# Altium PCB doppler.PcbDoc (part 2 of 2)
Units mil, origin at the board's own origin, x right, y up, seen from the top; angles counter-clockwise.
Board outline 6000 x 4000 mil, 2 copper layers (Top Layer, Bottom Layer); 102 components, 73 nets, 370 pads, 9 vias.
Unrouted connection lines stored in the file: 254.
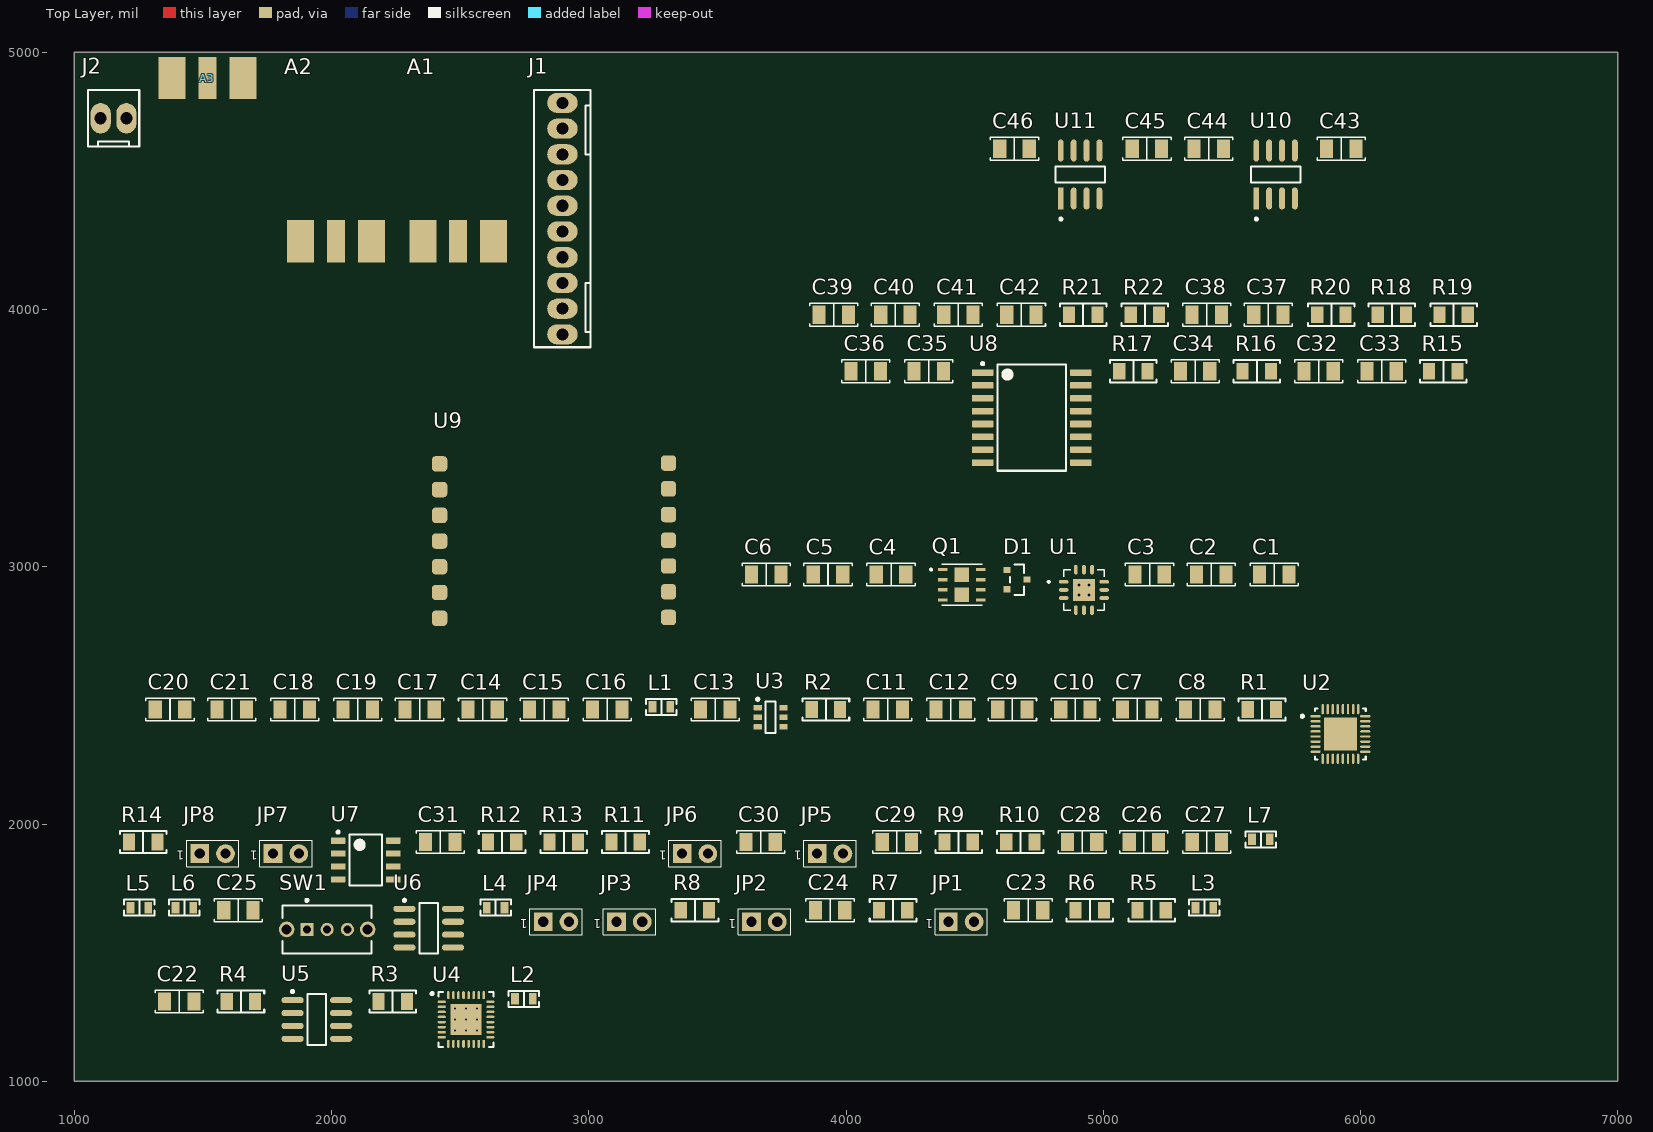
[diagram p0: Top Layer view]

## Part data (continued)
U3: library part CMP-0018-00482-2, "Wideband, Ultra-Low Noise, Voltage Feedback Operational Amplifier with Shutdown, 10 to 12 V, -40 to 85 degC, 6-pin SOT23 (DBV6), Green (RoHS & no Sb/Br)", Manufacturer="Texas Instruments", 2nd Harmonic(dBc)=105, 3rd Harmonic(dBc)=110, @ MHz=5, Acl, min stable gain(V/V)=12, BW @ Acl(MHz)=600, Code_JEDEC=MO-178, ComponentLink1Description="Manufacturer URL", ComponentLink1URL=http://www.ti.com/, ComponentLink2Description=Datasheet, ComponentLink2URL=http://www.ti.com/general/docs/lit/getliterature.tsp?genericPartNumber=OPA847&fileType=pdf, ComponentLink3Description="Package Specification", ComponentLink3URL=http://www.ti.com/litv/pdf/mpds026h, DatasheetVersion=SBOS251E, Eco-Plan="Green (RoHS & no Sb/Br)", Iib(Max)(nA)=42000, Io(Typ)(mA)=75, Iq per channel(Max)(mA)=18.9, Mounting Technology="Surface Mount", Number of Channels=1, PackageDescription="6-Pin Plastic Small Outline, Body 1.6 x 2.9 mm, Pitch 0.95 mm", PackageReference=DBV0006A, PackageVersion="4073253-5/K, 03/2006", PartNumber=OPA847IDBVR, Settling Time (0.1%)(Typ)(ns)=20, Slew Rate(Typ)(V/us)=950, Sub Family="High Output Current Amplifier (>=50mA), High Speed Amplifier (>=50MHz), Low Offset Voltage Amplifier (<=500uV)", THD (Fc is 1 MHz)(Typ)(dB)=-96, Vio(Max)(mV)=0.5, Vn at Flatband(Typ)(nV/rtHz)=0.85, Vs(Max)(V)=12, Vs(Min)(V)=10
U4: library part CMP-0285-00056-1, "DC to 50 MHz, Dual I/Q Demodulator and Phase Shifter, CP-32-2, Pb-Free, 1500 Reel", Max RF Frequency (MHz)=50MHz, Min RF Frequency (MHz)=0Hz, Amplitude Error (dB)=50mdB, Code_JEDEC=MO-220-VHHD-2, ComponentLink1Description="Manufacturer URL", ComponentLink1URL=www.analog.com, ComponentLink2Description=Datasheet, ComponentLink2URL=http://www.analog.com/static/imported-files/data_sheets/AD8333.pdf, ComponentLink3Description="Package Specification", ComponentLink3URL=http://www.analog.com/static/imported-files/packages/414143737956480539664569CP_32_2.pdf, DatasheetVersion="Rev. D", IIP3 (+dBm)=30dBm, PackageDescription="32-Lead Lead Frame Chip Scale Package [LFCSP_VQ]", PackageReference=CP-32-2, PackageVersion=Jan-2005, Phase Error (deg)=0.1Deg
U5 U6: library part CMP-0384-00646-2, "Single Channel Low Power Operational Amplifier, 490 MHz BW, 120 V/us SR, Industrial, 8-pin SOIC (R-8), Tube", Amplifiers Per Package=1, Generic Part Number=AD8021, Input Bias Current=7.5uA, Input Offset Voltage=400uV, Manufacturer="Analog Devices", Code_JEDEC=MS-012-AA, ComponentLink1Description="Manufacturer URL", ComponentLink1URL=http://www.analog.com/en/index.html, ComponentLink2Description=Datasheet, ComponentLink2URL=http://www.analog.com/static/imported-files/data_sheets/AD8021.pdf, ComponentLink3Description="Package Specification", ComponentLink3URL=http://www.analog.com/static/imported-files/packages/PKG_PDF/SOIC_Narrow%20(R)/R_8.pdf, ComponentLink4Description="Reference Circuit", ComponentLink4URL=http://www.analog.com/en/all-operational-amplifiers-op-amps/operational-amplifiers-op-amps/ad8021/products/product.html#product-recommendations, DatasheetVersion="Rev. F", Iq/Amp=7.7mA, Mounting Technology="Surface Mount", PackageDescription="8-Pin Standard Small Outline Package, Body 3.9 x 4.9 mm, Pitch 1.27 mm", PackageReference=R-8, PackageVersion=060506-A, PartNumber=AD8021ARZ, RevisionNote="Reference Circuit URL fixed", Slew Rate=120V/us, Small Signal Bandwidth=490MHz, V Span Max=24V, V Span Min=4.5V
U7: library part CMP-0058-00917-3, "Dual Low Voltage Differential Signaling (LVDS) Driver, 8 pin SOIC NARROW", Manufacturer="Texas Instruments", PackageTopMarking=NSZXTT*DS90C*401M, PowerWise=N, Code_IPC=SOIC127P600-8, Code_JEDEC=MS-012-AA, ComponentLink1Description="Datasheet URL", ComponentLink1URL=http://www.ti.com/general/docs/lit/getliterature.tsp?genericPartNumber=DS90C401&fileType=pdf, CompType="Interface IC", PackageDescription="SOIC Narrow, 4.9 x 3.9 x 1.45mm, 8 Lead, 1.27mm Pitch", PackageReference=D0008A, PinCount=8, RoHS=N
U8: library part CMP-0272-03500-3, "Quad Low-Noise High-Speed JFET-Input Operational Amplifier, 4.5 to 38 V, 0 to 70 degC, 16-pin SOIC (DW16), Green (RoHS & no Sb/Br)", Manufacturer="Texas Instruments", Rating=Catalog, Total Supply Voltage(Max)(+5V is 5, +/-5V is 10)=38, Total Supply Voltage(Min)(+5V is 5, +/-5V is 10)=4.5, CMRR(Min)(dB)=70, Code_JEDEC=MS-013, ComponentLink1Description="Manufacturer URL", ComponentLink1URL=http://www.ti.com/, ComponentLink2Description=Datasheet, ComponentLink2URL=http://www.ti.com/lit/ds/symlink/tle2074.pdf, ComponentLink3Description="Package Specification", ComponentLink3URL=http://www.ti.com/litv/pdf/msoi003g, DatasheetVersion=SLOS181C, Eco-Plan="Green (RoHS & no Sb/Br)", GBW(Typ)(MHz)=9.4, IIB(Max)(pA)=175, Iq per channel(Max)(mA)=1.875, Mounting Technology="Surface Mount", Number of Channels=4, Offset Drift(Typ)(uV/C)=10.1, PackageDescription="16-Pin Plastic Small Outline, Body 10.30 x 7.50 mm, Pitch 1.27 mm", PackageReference=DW0016A, PackageVersion="4040000-2/G, 01/2011", Packing=TUBE, PartNumber=TLE2074CDW, Slew Rate(Typ)(V/us)=35, Sub Family="High Output Current Amplifier (>=50mA), High Supply Voltage Amplifier (>=30V), Precision Amplifier", Vio (25C)(Max)(mV)=5
U9: library part CMP-00025-00003-2, "Rf Filter Band Pass 4.5MHZ 14SMD", Supplier 1=Mouser
U10 U11: library part CMP-09116-000396-1, "IC SAMPL/HOLD 1 CIRCUIT 8SOIC", Case/Package=SOIC, Dual Supply Voltage=5V, Input Bias Current=100nA, Input Offset Voltage (Vos)=50mV, Max Dual Supply Voltage=5.25V, Max Operating Temperature=70°C, Min Dual Supply Voltage=4.75V, Min Operating Temperature=0°C, Operating Supply Current=9.5mA, Output Current per Channel=5mA, Package Quantity=1, -3db Bandwidth=15MHz, Bandwidth=15MHz, Contact Plating=Tin, Height=2.45mm, Lead Free="Contains Lead", Length=5mm, Max Supply Voltage=5.25V, Min Supply Voltage=4.75V, Mount="Surface Mount", Number of Amplifiers=1, Number of Channels=1, Number of Circuits=1, Number of Pins=8, Operating Supply Voltage=5V, Packaging=Rail/Tube, REACH SVHC="No SVHC", RoHS Compliant=Yes, Series=-, Settling Time=150ns, Width=4.01mm

## Via types
v1: diameter 19.68, hole 7.87, Top Layer to Bottom Layer, 9 vias

## Nets (pads, with @x,y where several pads share a name; then routed paths per layer and width w, separated by ;. In a path a pad name is that pad's centre, name@x,y a point inside that pad or via, vN(x,y) a via of type N, cw(c..) or ccw(c..) an arc to the next point about the centre after c; other vN are vias at no path point)
+5: C1.2 C7.2 C8.2 C41.2 C42.2 C43.1 C45.1 L1.1 L2.2 L4.2 L6.2 R5.2 R6.2 R7.2 R8.2 R9.2 R10.2 R15.2 SW1.1 U1.8 U1.10 U1.11 U3.2 U4.26 U7.1 U8.4 U10.1 U11.1
+30: C2.2 Q1.4
-5: C6.2 C18.2 C19.2 C39.2 C40.2 C44.2 C46.1 L3.1 L5.1 L7.1 R12.2 R13.1 U1.2 U1.5 U1.6 U3.6 U8.13 U10.5 U11.5
-30: C5.2 Q1.1
GND: A1.G A2.G A3.G C1.1 C2.1 C5.1 C6.1 C7.1 C8.1 C11.2 C12.2 C14.1 C15.1 C16.2 C18.1 C19.1 C20.1 C21.1 C23.2 C24.2 C26.1 C27.1 C28.2 C32.1 C33.1 C34.1 C36.1 C38.1 C39.1 C40.1 C41.1 C42.1 C43.2 C44.1 C45.2 C46.2 J1.2 J1.4 JP1.2 JP2.2 JP3.2 JP4.2 R2.2 R11.2 R14.2 R16.2 SW1.3 U1.4 U2.6 U2.10 U2.11 U2.14 U2.15 U2.17 U2.24 U2.25 U2.27 U2.31 U2.33 U3.4 U3.5 U4.3 U4.7 U4.8 U4.9 U4.10 U4.12 U4.13 U4.20 U5.1 U5.3 U6.1 U6.3 U7.5 U7.8 U8.14 U8.15 U9.1 U9.3 U9.4 U9.5 U9.7 U9.8 U9.10 U9.11 U9.12 U9.14 U10.3 U11.3
LNAN_OUT: R1.2 U2.1
LNAP_OUT: C17.1 U2.32
LOSCN: JP6.2 JP8.2 U4.5
LOSCP: JP5.2 JP7.2 U4.4
NetA1_S: A1.S J1.7
NetA2_S: A2.S D1.3
NetA3_S: A3.S U9.2
NetC3_1: C3.1 U1.9
NetC3_2: C3.2 Q1.3
NetC4_1: C4.1 U1.7
NetC4_2: C4.2 Q1.2
NetC9_1: C9.1 U2.29
NetC9_2: C9.2 C10.2 C13.1 C16.1 U2.3
NetC10_1: C10.1 R1.1
NetC11_1: C11.1 C12.1 R2.1 U2.16
NetC13_2: C13.2 U3.1
NetC17_2: C17.2 U2.30
NetC20_2: C20.2 C21.2 U2.28
NetC22_1: C22.1 C24.1 L3.2 U5.4
NetC22_2: C22.2 U5.5
NetC23_1: C23.1 U4.6
NetC25_1: C25.1 C28.1 L7.2 U6.4
NetC25_2: C25.2 U6.5
NetC26_2: C26.2 L5.2 U4.21
NetC27_2: C27.2 L6.1 U4.11 U4.14 U4.27 U4.30
NetC29_1: C29.1 JP5.1 R9.1 R12.1
NetC29_2: C29.2 J2.1
NetC30_1: C30.1 JP6.1 R10.1 R13.2
NetC30_2: C30.2 J2.2
NetC31_1: C31.1 R14.1 U7.4
NetC31_2: C31.2 J1.6 R11.1
NetC32_2: C32.2 C33.2 R15.1 R16.1 U8.12
NetC35_1: C35.1 U10.8
NetC35_2: C35.2 R17.1 U8.3
NetC36_2: C36.2 R19.1
NetC37_1: C37.1 U11.8
NetC37_2: C37.2 R20.1 U8.5
NetC38_2: C38.2 R22.1
NetD1_1: D1.1 Q1.5 Q1.6 Q1.10
NetD1_2: D1.2 Q1.7 Q1.8 Q1.9
NetJ1_1: J1.1 U1.1
NetJ1_3: J1.3 U1.3
NetJ1_5: J1.5 U1.12
NetJ1_9: J1.9 R18.2 U8.1
NetJ1_10: J1.10 R21.2 U8.7
NetJP1_1: JP1.1 R5.1 U4.31
NetJP2_1: JP2.1 R6.1 U4.32
NetJP3_1: JP3.1 R7.1 U4.1
NetJP4_1: JP4.1 R8.1 U4.2
NetJP7_1: JP7.1 U7.3
NetJP8_1: JP8.1 U7.2
NetL2_1: L2.1 U5.7 U5.8
NetL4_1: L4.1 U6.7 U6.8
NetR3_1: R3.1 U4.29
NetR3_2: R3.2 U2.23
NetR4_1: R4.1 U4.28
NetR4_2: R4.2 U2.22
NetR18_1: R18.1 R19.2 U8.2
NetR21_1: R21.1 R22.2 U8.6
NetSW1_2: SW1.2 U4.15
NetU3_3: U3.3 U9.9
NetU4_24: U4.24 U5.2
NetU4_25: U4.25 U6.2
NetU5_6: U5.6 U10.2
NetU6_6: U6.6 U11.2
S_H: J1.8 U10.7 U11.7
VGND: C34.2 R17.2 R20.2 U8.10 U8.11
VPS: C14.2 C15.2 L1.2 U2.2 U2.7 U2.21 U2.26
pads on no net: SW1.4 SW1.5 U1.13 U1.14 U1.15 U1.16 U1.17 U2.4 U2.5 U2.8 U2.9 U2.12 U2.13 U2.18 U2.19 U2.20 U4.16 U4.17 U4.18 U4.19 U4.22 U4.23 U4.33 U7.6 U7.7 U8.8 U8.9 U8.16 U9.6 U9.13 U10.4 U10.6 U11.4 U11.6
copper on no net:
  other v1: 2479.61,1196.69 2522.91,1196.69 2566.22,1196.69 2479.61,1240 2522.91,1240 2566.22,1240 2479.61,1283.31 2522.91,1283.31 2566.22,1283.31

## Text inside footprints (layer, text, board x,y; h text height)
JP1: Top Overlay "1" at 4338.31,1641.81 h59.06 r180; Mechanical 14 "1" at 4387.87,1599.33 h59.06
JP2: Top Overlay "1" at 3573.31,1641.81 h59.06 r180; Mechanical 14 "1" at 3622.87,1599.33 h59.06
JP3: Top Overlay "1" at 3048.31,1641.81 h59.06 r180; Mechanical 14 "1" at 3097.87,1599.33 h59.06
JP4: Top Overlay "1" at 2763.31,1641.81 h59.06 r180; Mechanical 14 "1" at 2812.87,1599.33 h59.06
JP5: Top Overlay "1" at 3828.31,1906.81 h59.06 r180; Mechanical 14 "1" at 3877.87,1864.33 h59.06
JP6: Top Overlay "1" at 3303.31,1906.81 h59.06 r180; Mechanical 14 "1" at 3352.87,1864.33 h59.06
JP7: Top Overlay "1" at 1713.31,1906.81 h59.06 r180; Mechanical 14 "1" at 1762.87,1864.33 h59.06
JP8: Top Overlay "1" at 1428.31,1906.81 h59.06 r180; Mechanical 14 "1" at 1477.87,1864.33 h59.06